# Altium PCB Opto_PCB_v1.PcbDoc
Units mil, origin at the board's own origin, x right, y up, seen from the top; angles counter-clockwise.
Board outline 2875 x 3170 mil, 2 copper layers (Top Layer, Bottom Layer); 29 components, 25 nets, 117 pads, 0 vias.
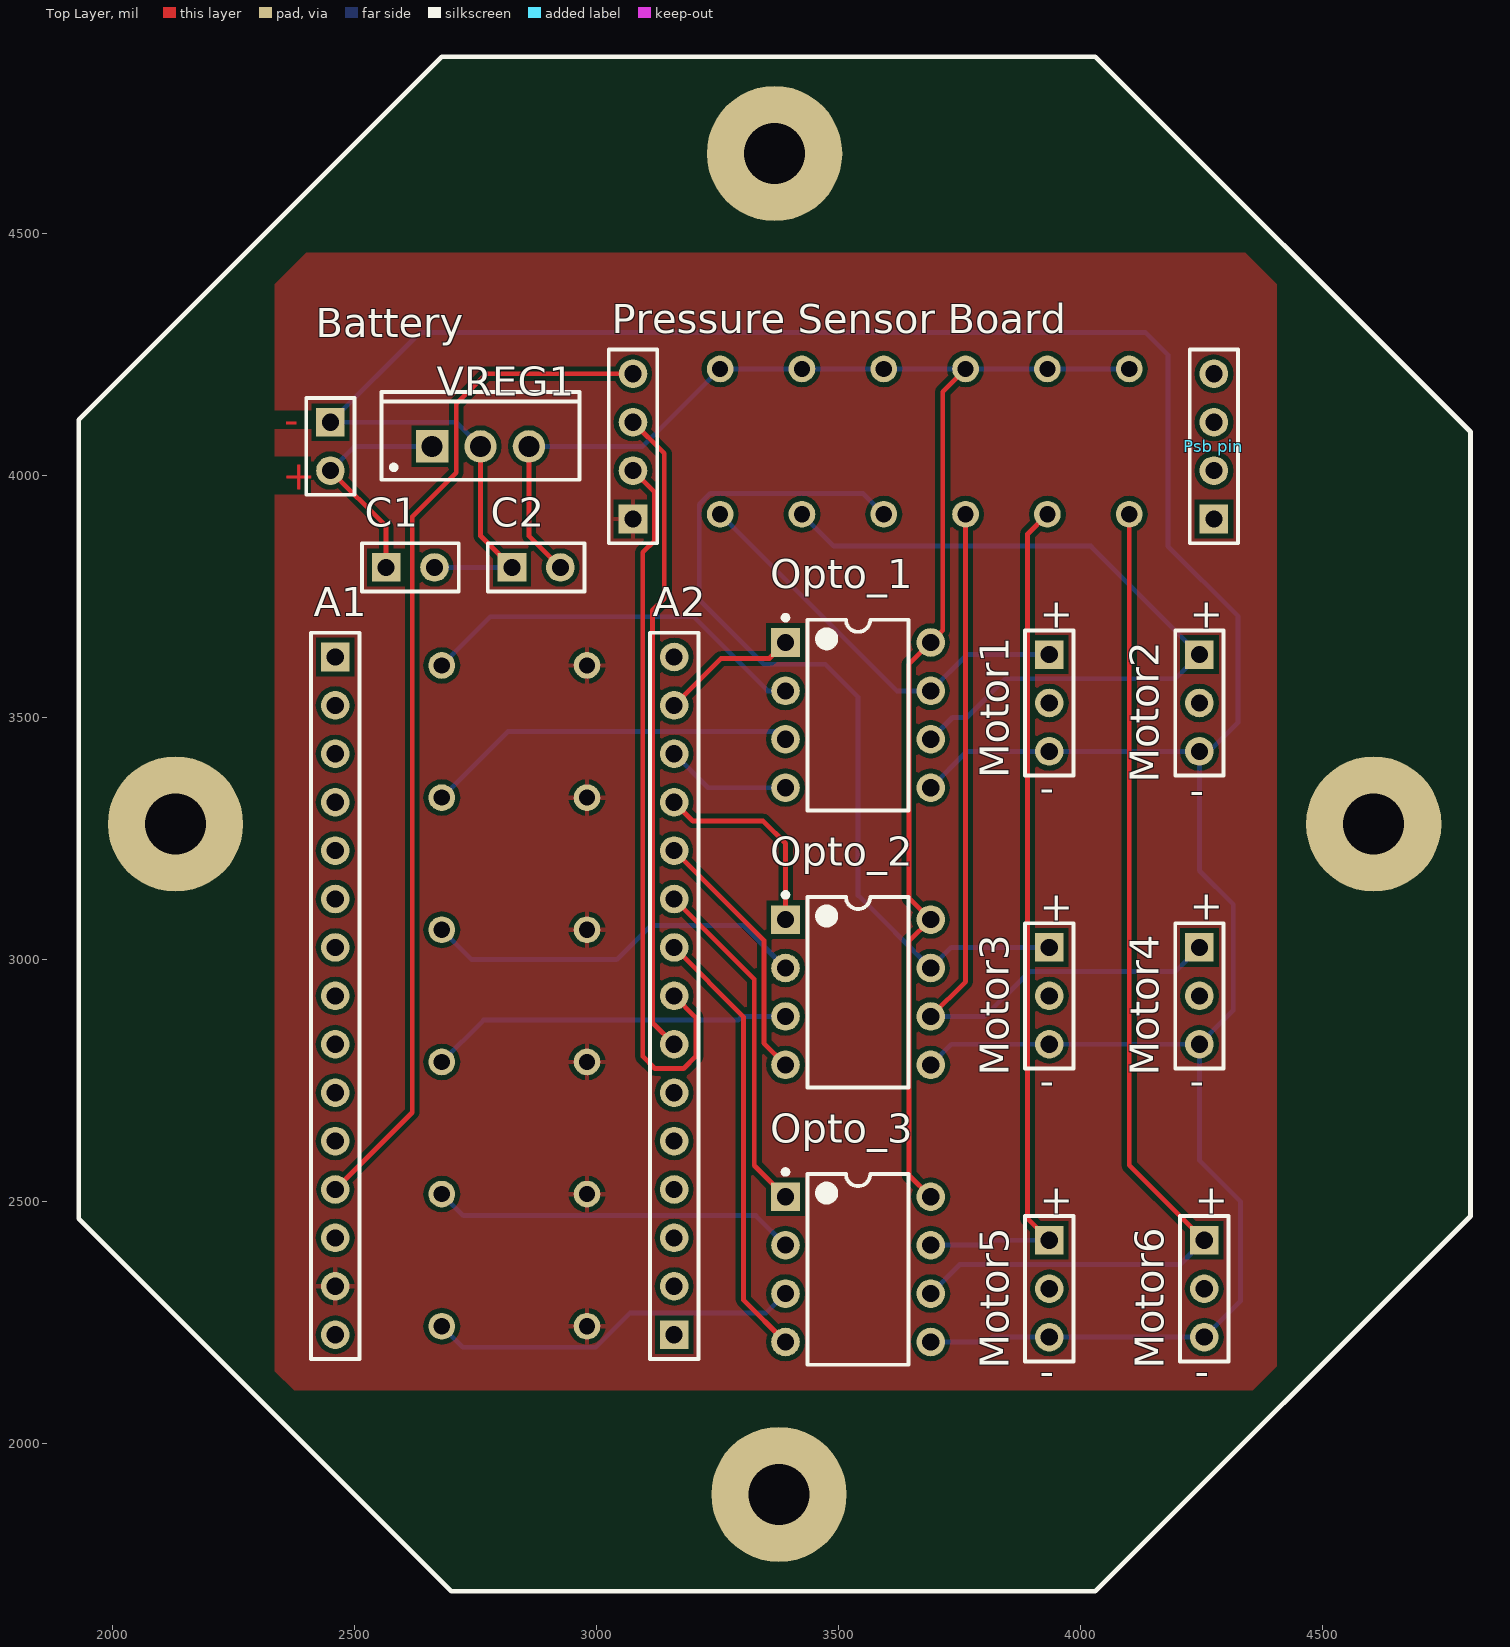
[diagram p0: Top Layer view]
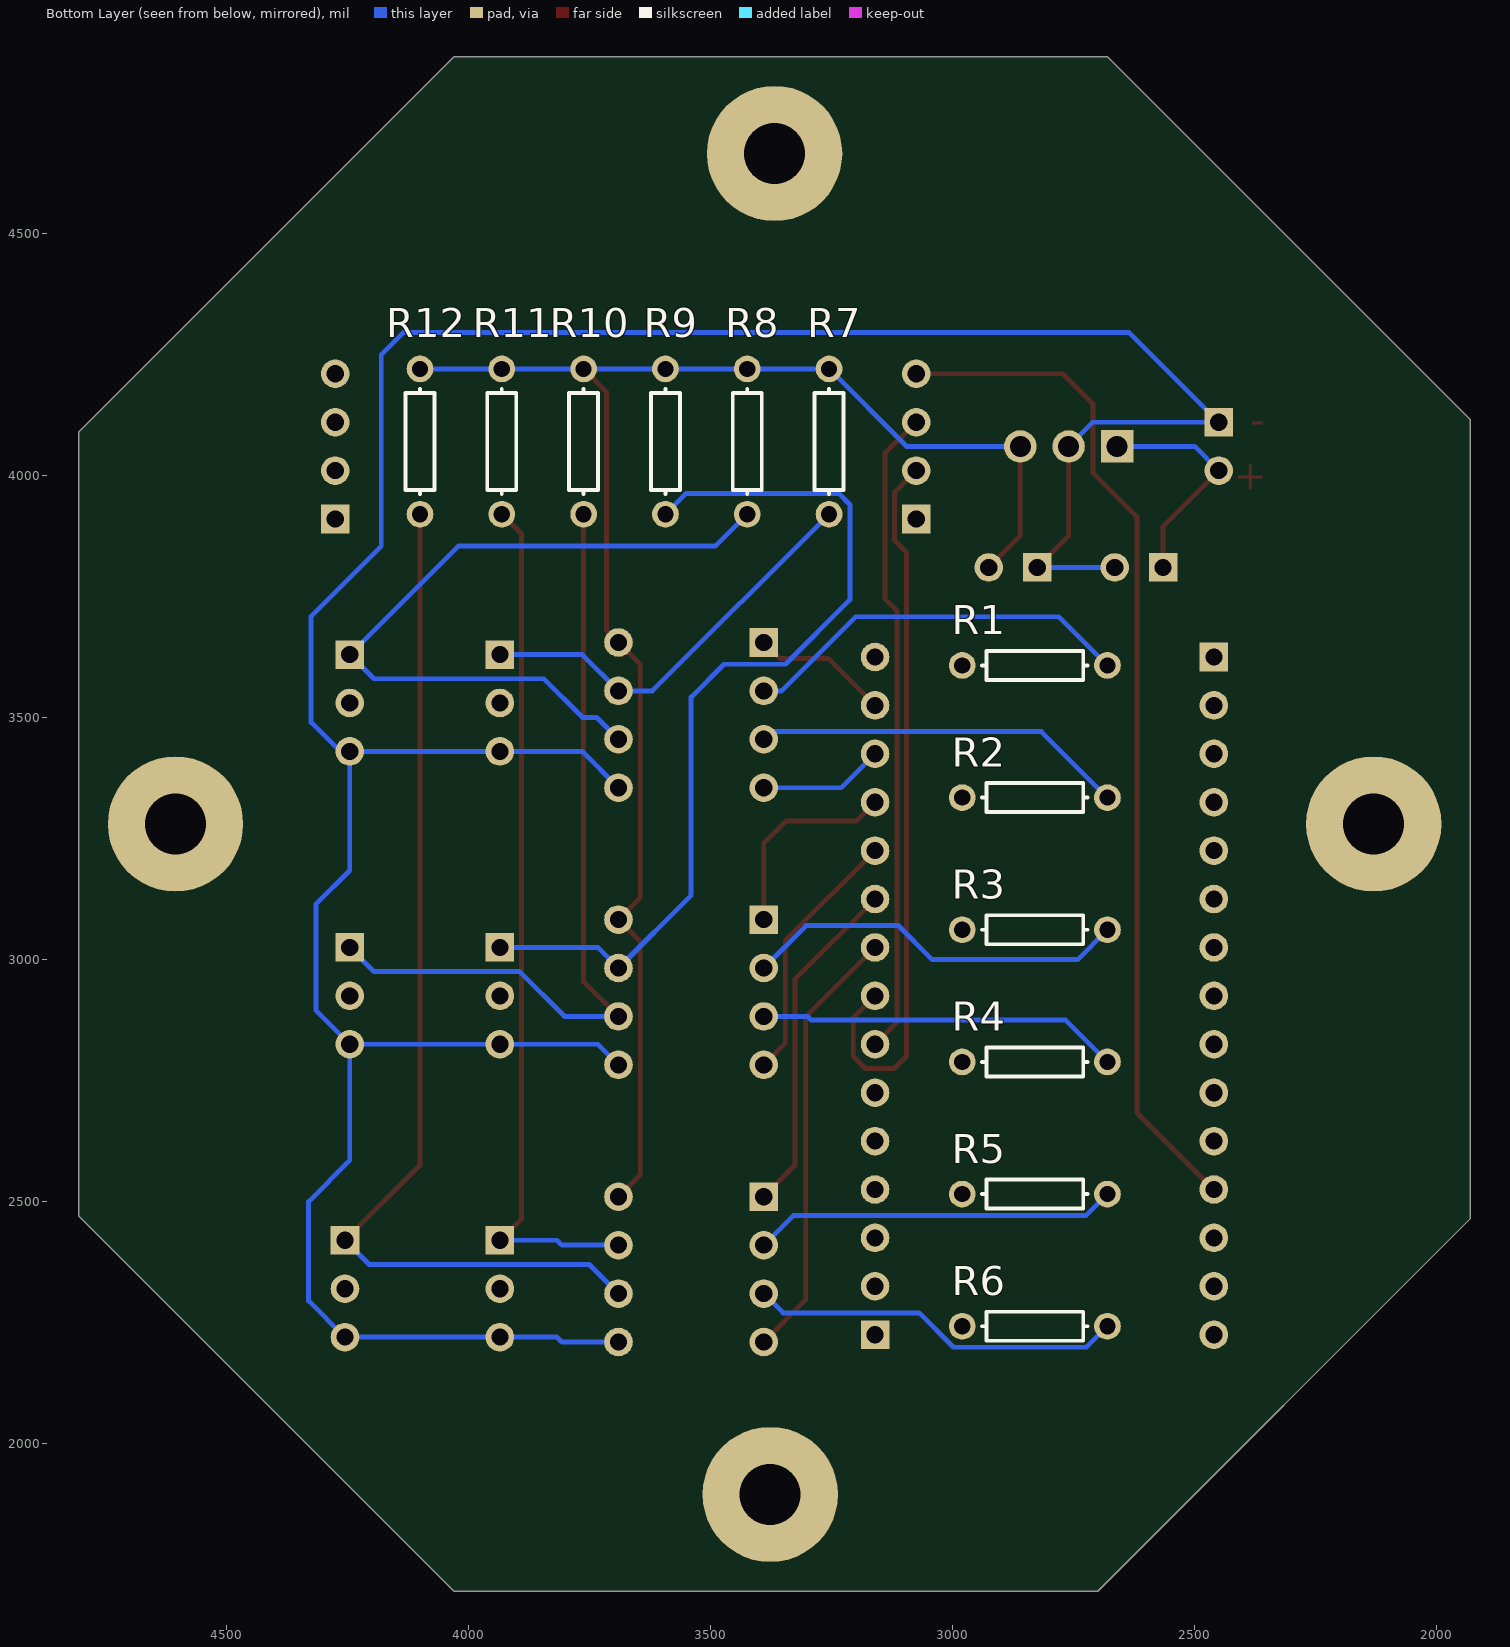
[diagram p1: Bottom Layer view, seen from below]

## Layer stack, top to bottom
Top Solder: solder mask 0.4, Solder Resist, Dk 3.5
Top Layer: signal copper 1.4
Dielectric 1: dielectric 12.6, FR-4, Dk 4.8
Bottom Layer: signal copper 1.4
Bottom Solder: solder mask 0.4, Solder Resist, Dk 3.5

## Board outline
1930,2465 1930,4115 2680,4865 4030,4865 4805,4090 4805,2470 4030,1695 2700,1695

## Design rules (kind name [scope] priority, off if disabled: settings)
Clearance [All] p1: gap=10
PolygonConnect [All] p1: connectstyle=Relief reliefconductorwidth=10 reliefentries=4 polygonreliefangle="90 Angle" airgapwidth=10
RoomDefinition Optocoupler_circuit [InComponentClass('Optocoupler_circuit')] p1: confinementstyle=ConfineIn formatcopy=TRUE lockcomponents=FALSE outline 4405,4465 2330,4465 2330,2095 4405,2095
RoutingVias [All] p1: holewidth=28 width=50 viastyle="Through Hole" minholewidth=28 minwidth=50 maxholewidth=28 maxwidth=50
SolderMaskExpansion [All] p1: expansion=4
Width [All] p1: maxlimit=10 minlimit=10 preferedwidth=10
30 further rules are at their usual default settings.

## Components (designator, comment, footprint, x,y, rotation, side; value= is the part's Value field where it differs from the comment)
A1 "Header 15" HDR1X15 2460,3625 r270 top
A2 "Header 15" HDR1X15 3160,2225 r90 top
Battery "Header 2" HDR1X2 2450,4110 r270 top
C1 "Cap" HDR1X2 2565,3810 r0 top
C2 "Cap" HDR1X2 2825,3810 r0 top
Motor1 "Header 3" HDR1X3 3935,3630 r270 top
Motor2 "Header 3" HDR1X3 4245,3630 r270 top
Motor3 "Header 3" HDR1X3 3935,3025 r270 top
Motor4 "Header 3" HDR1X3 4245,3025 r270 top
Motor5 "Header 3" HDR1X3 3935,2420 r270 top
Motor6 "Header 3" HDR1X3 4255,2420 r270 top
Opto_1 "HCPL2531" FAIR-MDIP-8 3540,3505 r0 top
Opto_2 "HCPL2531" FAIR-MDIP-8 3540,2932.5 r0 top
Opto_3 "HCPL2531" FAIR-MDIP-8 3540,2360 r0 top
"Pressure Sensor Board" "Header 4" HDR1X4 3075,3910 r90 top
"Psb pin" "Header 4" HDR1X4 4275,3910 r90 top
R1 "300" AXIAL-0.3 2830,3607.5 r180 bottom
R2 "300" AXIAL-0.3 2830,3334.5 r180 bottom
R3 "300" AXIAL-0.3 2830,3061.5 r180 bottom
R4 "300" AXIAL-0.3 2830,2788.5 r180 bottom
R5 "300" AXIAL-0.3 2830,2515.5 r180 bottom
R6 "300" AXIAL-0.3 2830,2242.5 r180 bottom
R7 "300" AXIAL-0.3 3255,4070 r90 bottom
R8 "300" AXIAL-0.3 3424,4070 r90 bottom
R9 "300" AXIAL-0.3 3593,4070 r90 bottom
R10 "300" AXIAL-0.3 3762,4070 r90 bottom
R11 "300" AXIAL-0.3 3931,4070 r90 bottom
R12 "300" AXIAL-0.3 4100,4070 r90 bottom
VREG1 "L7805CV" TO220 2760,4060 r0 top

## Footprints (in the part's own frame and the unit in brackets; to place one, negate y for a bottom-side part, rotate by r counter-clockwise, add the part's x,y. Pads: shape width x height; smd on the part's side, far side on the other; paste and mask are expansions set on the pad)
AXIAL-0.3 [mm] "Axial Device, Thru-Hole; 2 Leads; 0.3 in Pin Spacing"
  round 1.4 hole 0.85: 1(-3.81,0) 2(3.81,0)
  silkscreen extent -2.77,-0.76 2.77,0.76
FAIR-MDIP-8 [mm] "DIP, 8-Leads, Body 9.9x6.85mm, Pitch 2.54mm"
  rect 1.5x1.5 hole 0.9: 1(-3.81,3.81)
  round 1.5 hole 0.9: 2(-3.81,1.27) 3(-3.81,-1.27) 4(-3.81,-3.81) 5(3.81,-3.81) 6(3.81,-1.27) 7(3.81,1.27) 8(3.81,3.81)
  silkscreen extent -3.93,-5 2.65,5.23, body extent -3.95,-4.95 3.95,4.95, height 5.08
HDR1X2 [mm] "Connector; Header; 2 Position"
  rect 1.5x1.5 hole 0.9: 1(0,0)
  round 1.5 hole 0.9: 2(2.54,0)
  silkscreen extent -1.27,-1.27 3.81,1.27
HDR1X3 [mm] "Connector; Header; 3 Position"
  rect 1.5x1.5 hole 0.9: 1(0,0)
  round 1.5 hole 0.9: 2(2.54,0) 3(5.08,0)
  silkscreen extent -1.27,-1.27 6.35,1.27
HDR1X4 [mm] "Connector; Header; 4 Position"
  rect 1.5x1.5 hole 0.9: 1(0,0)
  round 1.5 hole 0.9: 2(2.54,0) 3(5.08,0) 4(7.62,0)
  silkscreen extent -1.27,-1.27 8.89,1.27
HDR1X15 [mm] "Connector; Header; 15 Position"
  rect 1.5x1.5 hole 0.9: 1(0,0)
  round 1.5 hole 0.9: 2(2.54,0) 3(5.08,0) 4(7.62,0) 5(10.16,0) 6(12.7,0) 7(15.24,0) 8(17.78,0) 9(20.32,0) 10(22.86,0) 11(25.4,0) 12(27.94,0) 13(30.48,0) 14(33.02,0) 15(35.56,0)
  silkscreen extent -1.27,-1.27 36.83,1.27
TO220 [mm] "TO, Thru-Hole, Vertical, Heatsink Mounted; 3 In-Line Leads; Pitch 2.54 mm"
  rect 1.7x1.7 hole 1.1: 1(-2.54,0)
  round 1.7 hole 1.1: 2(0,0) 3(2.54,0)
  silkscreen extent -5.2,-1.75 5.2,2.85, body extent -5.25,-1.8 5.25,2.9, height 19.7

## Part data
A1 A2: "Header, 15-Pin"
Battery: "Header, 2-Pin"
C1 C2: "Capacitor"
Motor1 Motor2 Motor3 Motor4 Motor5 Motor6: "Header, 3-Pin"
Opto_1 Opto_2 Opto_3: library part CMP-2000-06391-1, "Dual-Channel High Speed Transistor Output Optocoupler, 1.45 V Forward Voltage, -55 to 100 degC, 8-Pin DIP, RoHS, Tube"
"Pressure Sensor Board" "Psb pin": "Header, 4-Pin"
R1 R2 R3 R4 R5 R6 R7 R8 R9 R10 R11 R12: library part Res1, "Resistor"
VREG1: library part CMP-0244-00483-1, "Positive Voltage Regulator, 5V, 3-Pin TO-220"

## Free pads (board coordinates)
  round 279.53 hole 125.98 unplated: 8(2130,3280) 8(3367.5,4665) 8(3376.5,1895) 8(4605,3280)

## Nets (pads, with @x,y where several pads share a name; then routed paths per layer and width w, separated by ;. In a path a pad name is that pad's centre, name@x,y a point inside that pad or via, vN(x,y) a via of type N, cw(c..) or ccw(c..) an arc to the next point about the centre after c; other vN are vias at no path point)
5V: "Pressure Sensor Board.4" A1.12 | length 2117.2
  Top Layer w10: A1.12 2619,2684 2619,3915 2710,4006 2710,4148 2772,4210 3075,4210
5Vcc: C2.2 Opto_1.8 Opto_2.8 Opto_3.8 R7.2 R8.2 R9.2 R10.2 R11.2 R12.2 VREG1.3 | length 3397.6
  Top Layer w10: VREG1.3 2860,3875 C2.2 ; Opto_3.8 3645,2555 3645,3037.5 Opto_2.8 3645,3127.5 3645,3610 Opto_1.8 3715,3680 3715,4173 R10.2
  Bottom Layer w10: VREG1.3 3095,4060 R7.2 R8.2 R9.2 R10.2 R11.2 R12.2
"Battery +": Battery.2 C1.1 VREG1.1 | length 478.3
  Top Layer w10: Battery.2 2565,3895 C1.1
  Bottom Layer w10: Battery.2 2500,4060 VREG1.1
GND: Battery.1 C1.2 C2.1 Motor1.3 Motor2.3 Motor3.3 Motor4.3 Motor5.3 Motor6.3 Opto_1.5 Opto_2.5 Opto_3.5 VREG1.2 | length 6579.4
  Top Layer w10: VREG1.2 2760,3875 C2.1
  Bottom Layer w10: C1.2 C2.1 ; VREG1.2 2710,4110 Battery.1 2635,4295 4134.14,4295 4180,4249.14 4180,3854.14 4325,3709.14 4325,3490 4265,3430 Motor2.3 ; Opto_3.5 3807,2210 3817,2220 Motor5.3 Motor6.3 4330,2295 4330,2500 4245,2585 Motor4.3 ; Opto_2.5 3732.5,2825 Motor3.3 Motor4.3 ; Opto_1.5 3765,3430 Motor1.3 Motor2.3 ; Motor4.3 4315,2895 4315,3113.9 4245,3183.9 Motor2.3
"MCU GND": "Pressure Sensor Board.1" A1.14 R1.1 R2.1 R3.1 R4.1 R5.1 R6.1
NetA2_9: A2.9 Opto_3.4 | length 910.3
  Top Layer w10: A2.9 3303,2882 3303,2297 Opto_3.4
NetA2_10: A2.10 Opto_3.1 | length 710.3
  Top Layer w10: A2.10 3325.47,2959.53 3325.47,2574.53 Opto_3.1
NetA2_11: A2.11 Opto_2.4 | length 537.8
  Top Layer w10: A2.11 3345.47,3039.53 3345.47,2827.03 Opto_2.4
NetA2_12: A2.12 Opto_2.1 | length 422.7
  Top Layer w10: A2.12 3199,3286 3344,3286 3390,3240 Opto_2.1
NetA2_13: A2.13 Opto_1.4 | length 259
  Bottom Layer w10: A2.13 3230,3355 Opto_1.4
NetA2_14: A2.14 Opto_1.1 | length 283.8
  Top Layer w10: A2.14 3257,3622 3357,3622 Opto_1.1
NetMotor1_1: Motor1.1 Opto_1.7 R7.1 | length 862.3
  Bottom Layer w10: R7.1 3620,3555 Opto_1.7 3765,3630 Motor1.1
NetMotor2_1: Motor2.1 Opto_1.6 R8.1 | length 1568.6
  Bottom Layer w10: R8.1 3490,3854 4021,3854 Motor2.1 4195,3580 3844,3580 3764,3500 3735,3500 Opto_1.6
NetMotor3_1: Motor3.1 Opto_2.7 R9.1 | length 1900.8
  Bottom Layer w10: R9.1 3550,3963 3235,3963 3212,3940 3212,3743 3345,3610 3472,3610 3540,3542 3540,3132.5 Opto_2.7 3732.5,3025 Motor3.1
NetMotor4_1: Motor4.1 Opto_2.6 R10.1 | length 1681.3
  Top Layer w10: Opto_2.6 3762,2954.5 R10.1
  Bottom Layer w10: Opto_2.6 3801.5,2882.5 3894,2975 4195,2975 Motor4.1
NetMotor5_1: Motor5.1 Opto_3.7 R11.1 | length 1784.8
  Top Layer w10: R11.1 3890,3879 3890,2465 Motor5.1
  Bottom Layer w10: Opto_3.7 3807,2410 3817,2420 Motor5.1
NetMotor6_1: Motor6.1 Opto_3.6 R12.1 | length 2174.8
  Top Layer w10: R12.1 4100,2575 Motor6.1
  Bottom Layer w10: Opto_3.6 3750,2370 4205,2370 Motor6.1
NetOpto_1_2: Opto_1.2 R1.2 | length 815
  Bottom Layer w10: R1.2 2780.5,3708 3200.11,3708 3353.11,3555 Opto_1.2
NetOpto_1_3: Opto_1.3 R2.2 | length 782.5
  Bottom Layer w10: R2.2 2816.5,3471 3390,3471 Opto_1.3
NetOpto_2_2: Opto_2.2 R3.2 | length 800.7
  Bottom Layer w10: R3.2 2741.5,3000 3041.5,3000 3111.5,3070 3302.5,3070 Opto_2.2
NetOpto_2_3: Opto_2.3 R4.2 | length 748.9
  Bottom Layer w10: R4.2 2766.5,2875 3292,2875 3299.5,2882.5 Opto_2.3
NetOpto_3_2: Opto_3.2 R5.2 | length 753.7
  Bottom Layer w10: R5.2 2724.5,2471 3329,2471 Opto_3.2
NetOpto_3_3: Opto_3.3 R6.2 | length 774
  Bottom Layer w10: R6.2 2723.5,2199 2998,2199 3069,2270 3350,2270 Opto_3.3
SCL: "Pressure Sensor Board.2" A2.8 | length 1513
  Top Layer w10: 3075,4010 3119.53,3965.47 3119.53,3865.47 3095,3840.94 3095,2800 3120,2775 3180,2775 3205,2800 3205,2880 A2.8
SDA: "Pressure Sensor Board.3" A2.7 | length 1340.5
  Top Layer w10: 3075,4110 3139.53,4045.47 3139.53,3745.53 3115,3721 3115,2870 A2.7
pads on no net: "Psb pin.1" "Psb pin.2" "Psb pin.3" "Psb pin.4" A1.1 A1.2 A1.3 A1.4 A1.5 A1.6 A1.7 A1.8 A1.9 A1.10 A1.11 A1.13 A1.15 A2.1 A2.2 A2.3 A2.4 A2.5 A2.6 A2.15 Motor1.2 Motor2.2 Motor3.2 Motor4.2 Motor5.2 Motor6.2

## Polygon pours and split planes (outlines as drawn)
"MCU GND" on Top Layer "Top Layer-MCU GND" (solid, pour order 0): 2335,4395 2400,4460 4340,4460 4405,4395 4405,2160 4355,2110 2375,2110 2335,2150

## Other copper
Top Layer:
  text "-" at 2355,4085 h60
  text "+" at 2350,3970 h60

## Silkscreen, mask and mechanical layers (free items; w line width, h text height)
Top Overlay:
  the board outline again, w10
  text "+" at 3915,3685 h60
  text "+" at 4225,3685 h60
  text "-" at 3915,3325 h60
  text "-" at 4225,3320 h60
  text "+" at 4225,3082.5 h60
  text "+" at 3915,3080 h60
  text "-" at 3915,2720 h60
  text "-" at 4225,2720 h60
  text "+" at 3915,2475 h60
  text "+" at 4235,2475 h60
  text "-" at 3915,2120 h60
  text "-" at 4235,2120 h60